# Altium PCB final.PcbDoc
Units mm, origin at the board's own origin, x right, y up, seen from the top; angles counter-clockwise.
Board outline 57 x 40.78 mm, 2 copper layers (Top Layer, Bottom Layer); 66 components, 53 nets, 287 pads, 60 vias.
Unrouted connection lines stored in the file: 75.
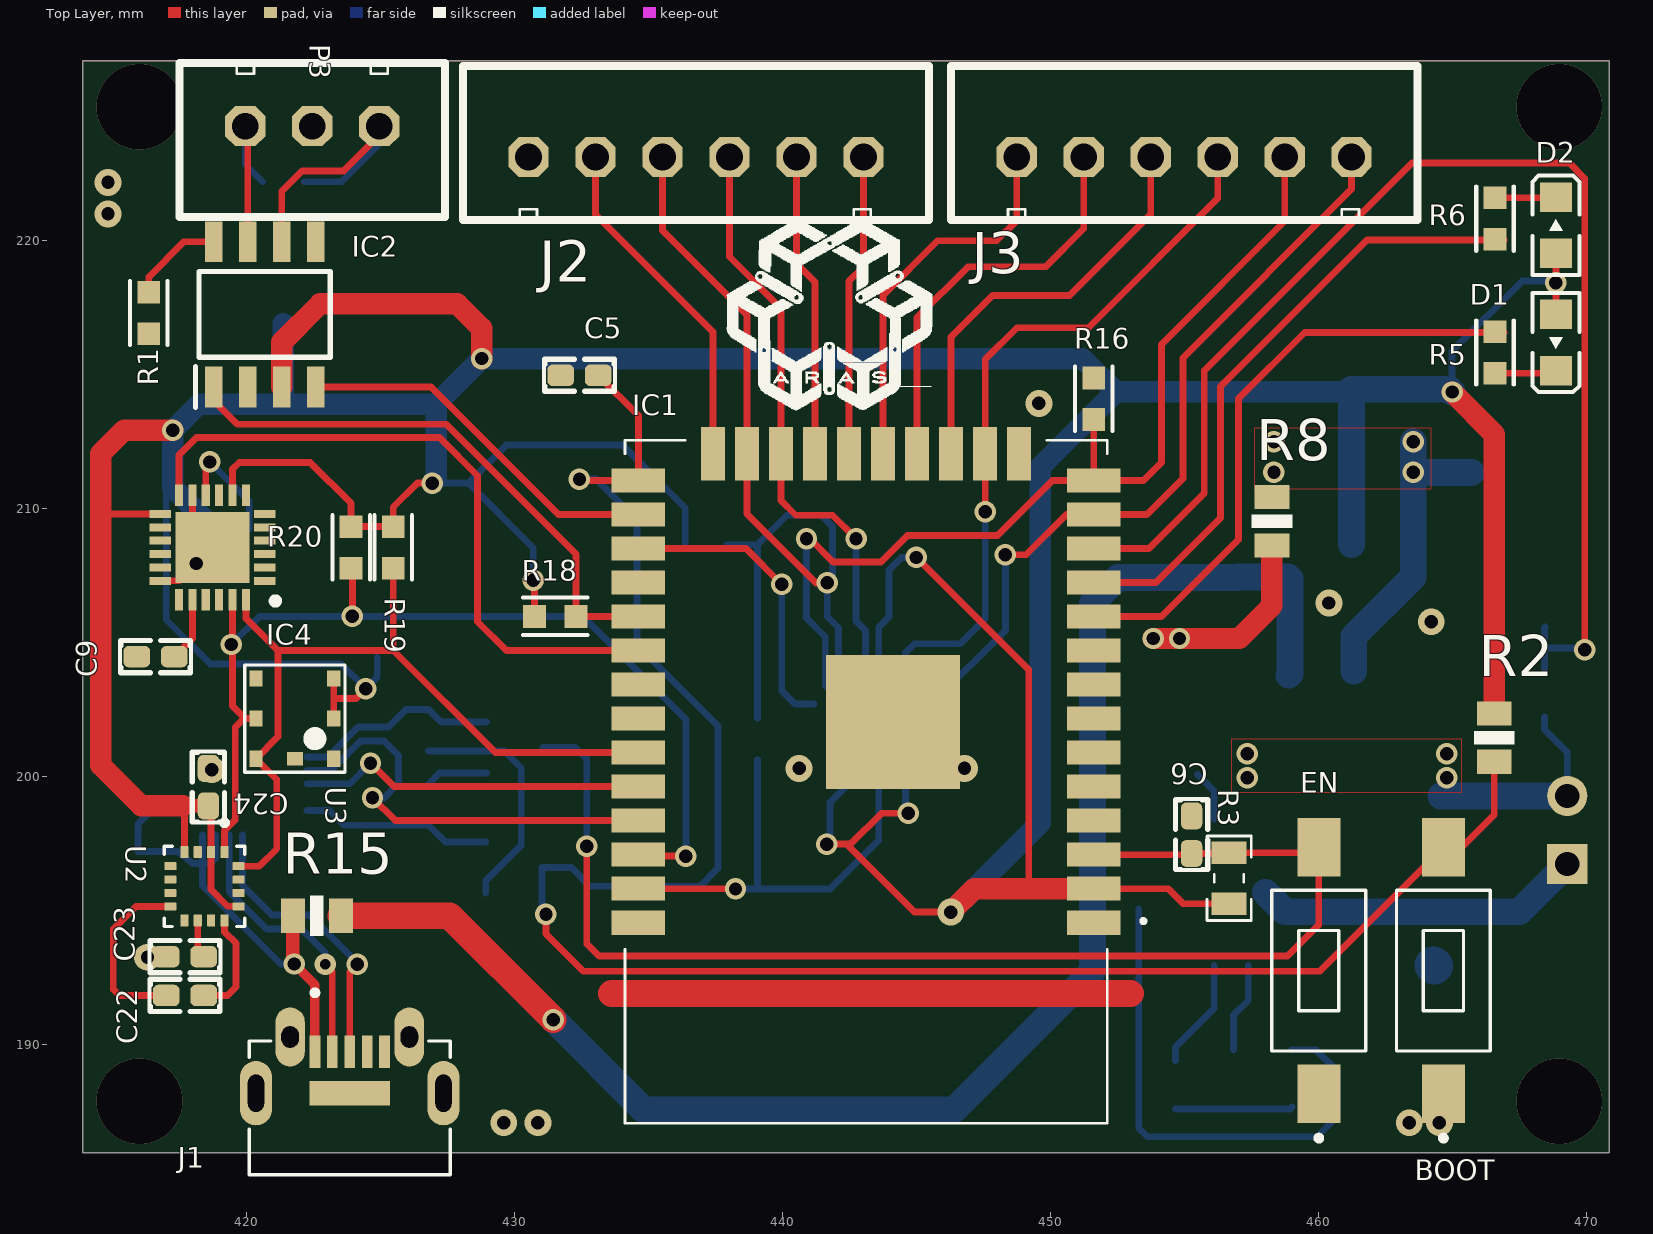
[diagram p0: Top Layer view]
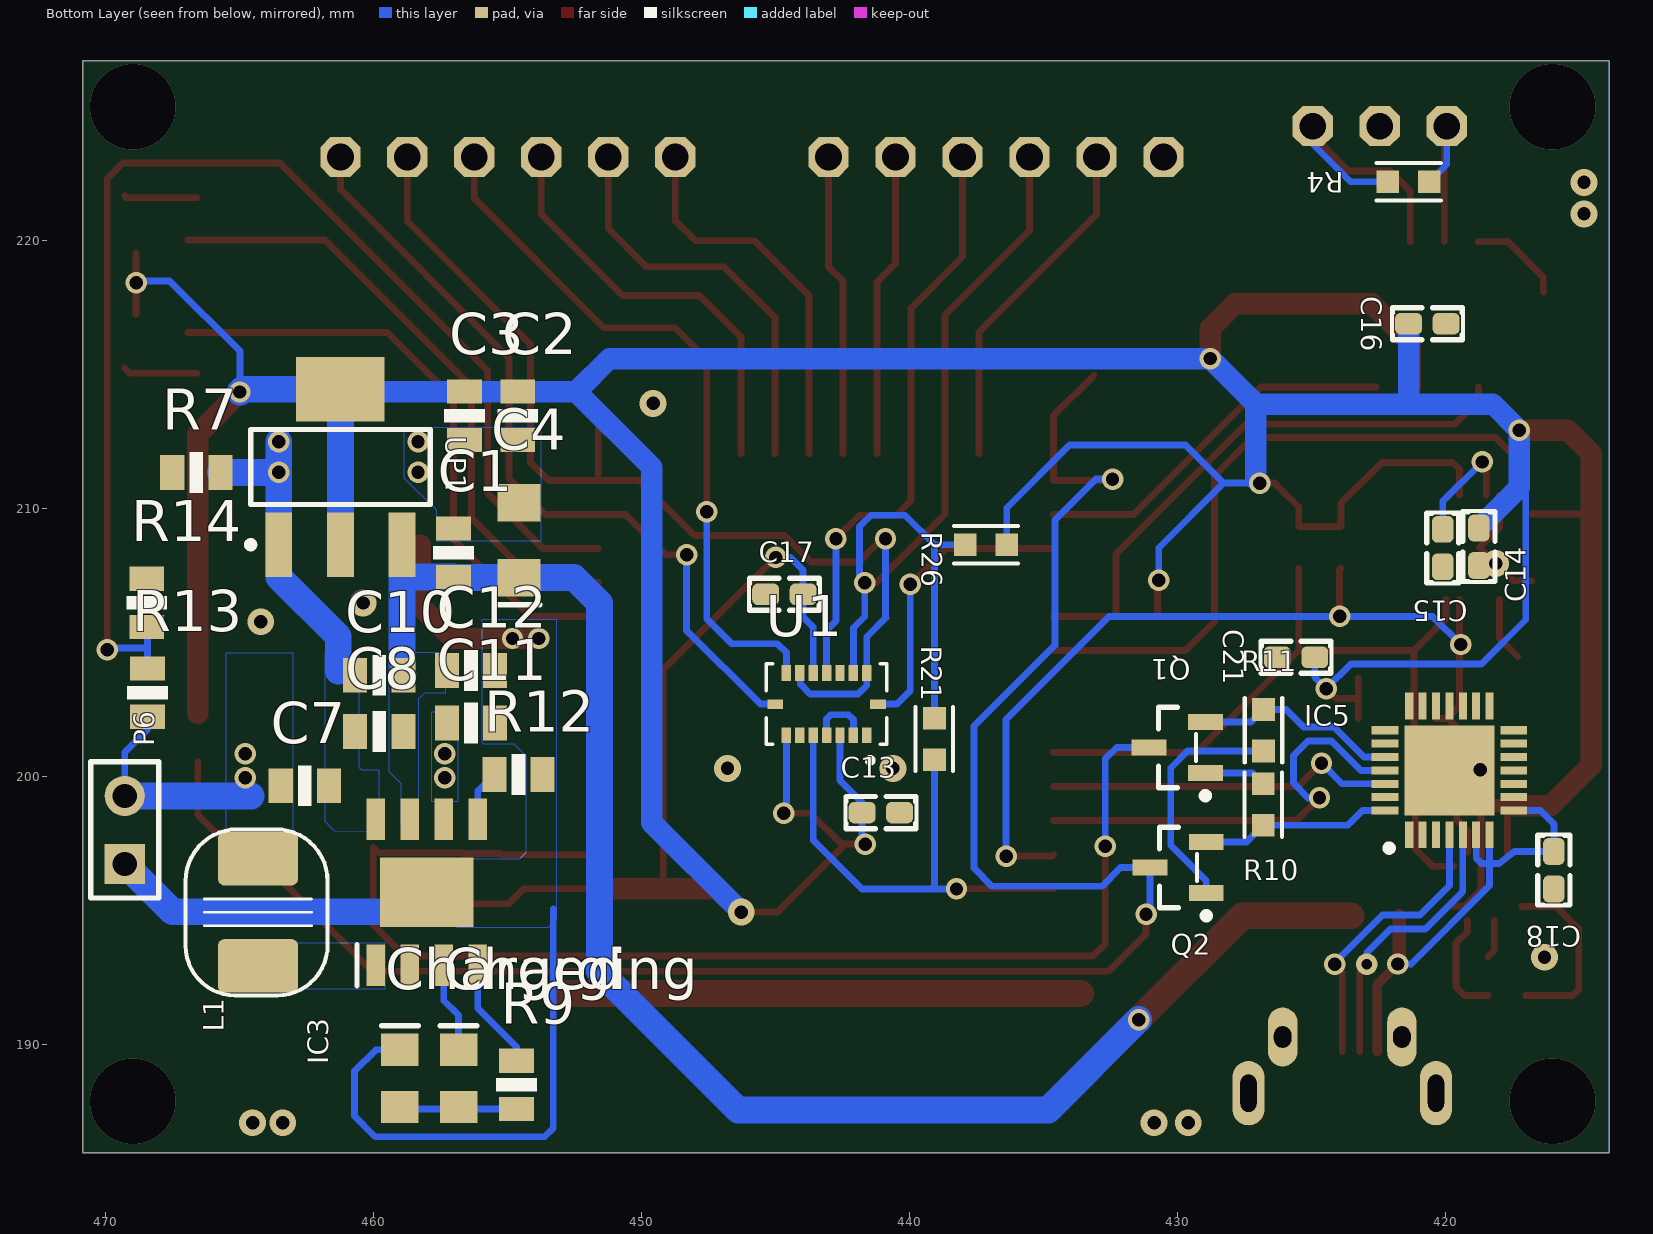
[diagram p1: Bottom Layer view, seen from below]
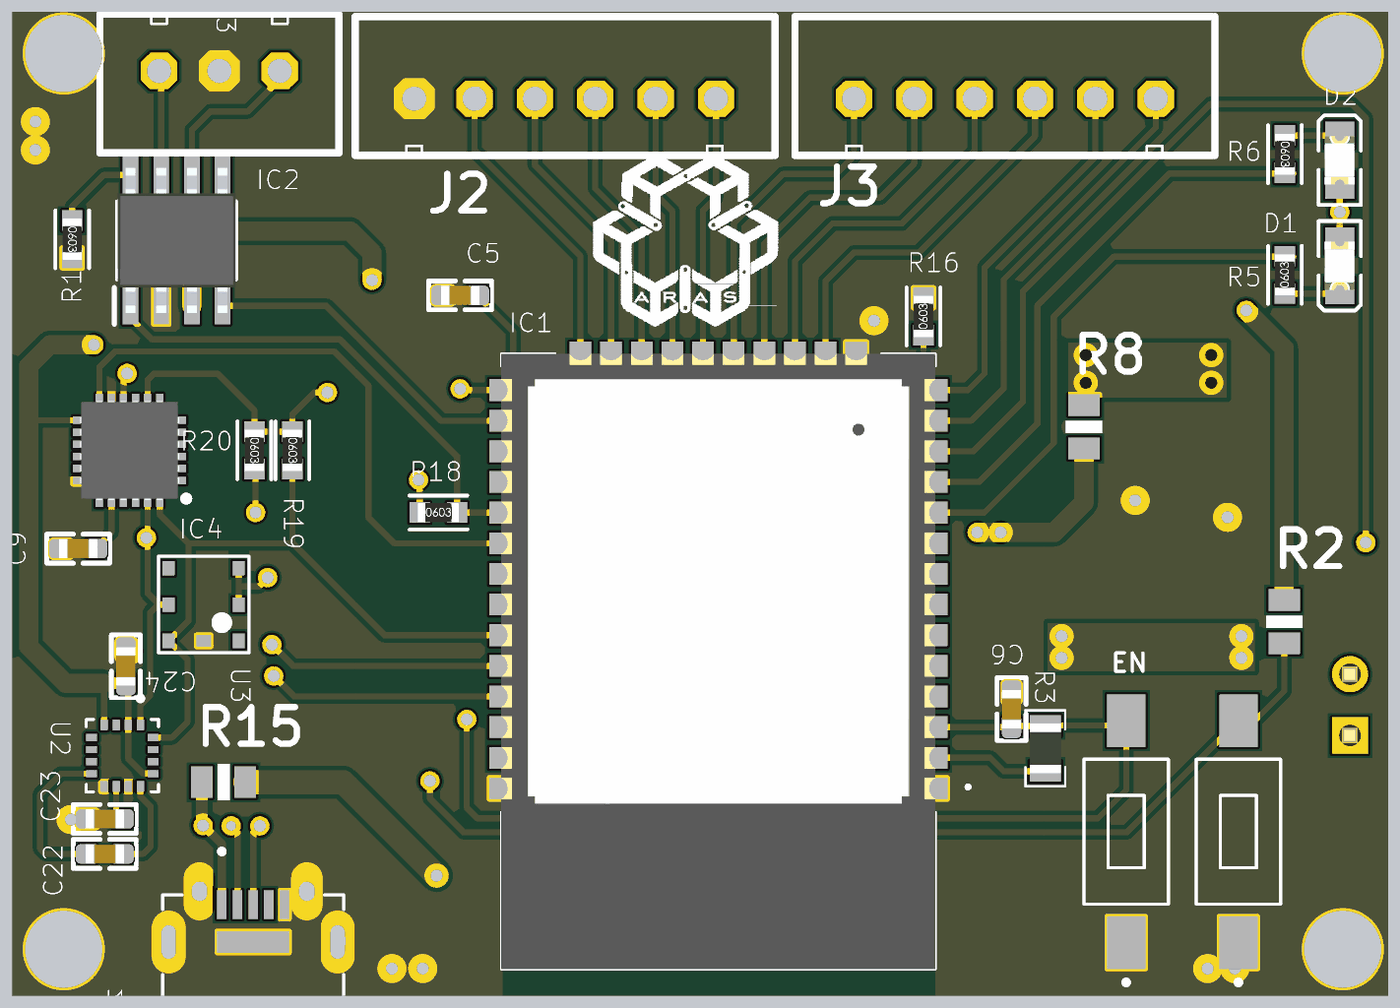
[diagram p2: 3D render of the assembled board from above, using the file's embedded part models]
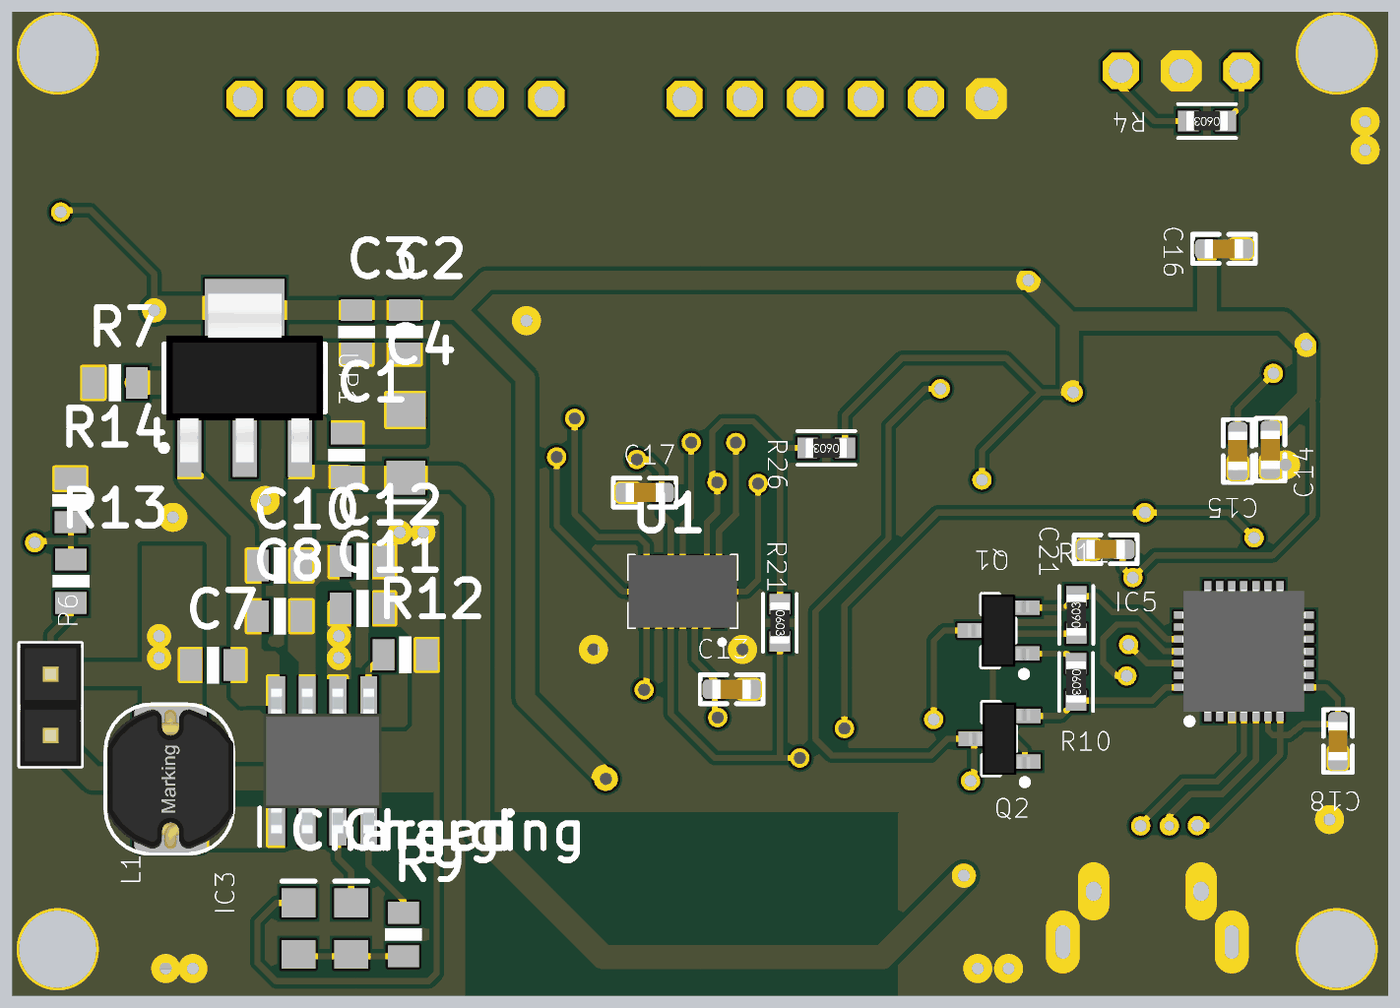
[diagram p3: 3D render of the assembled board from below, using the file's embedded part models]

## Layer stack, top to bottom
Top Solder: solder mask 0.0102, Solder Resist, Dk 3.5
Top Layer: signal copper 0.0356
Dielectric 1: dielectric 0.32, FR-4, Dk 4.8
Bottom Layer: signal copper 0.0356
Bottom Solder: solder mask 0.0102, Solder Resist, Dk 3.5

## Board outline
413.875,185.95 470.875,185.95 470.875,226.725 413.875,226.725

## Design rules (kind name [scope] priority, off if disabled: settings)
Clearance [All] p1: gap=0.178 ignorepadtopadclearanceinfootprint=TRUE except(0: Arc-Hole Track-Hole SMDPad-Hole THPad-Hole Via-Hole Fill-Hole Poly-Hole Region-Hole Text-Hole)
PolygonConnect [All] p1: connectstyle=Direct reliefconductorwidth=0.254 reliefentries=4 polygonreliefangle="90 Angle" airgapwidth=0.254
RoutingVias [All] p1: holewidth=0.711 width=1.27 viastyle="Through Hole" minholewidth=0.711 minwidth=1.27 maxholewidth=0.711 maxwidth=1.27
SolderMaskExpansion [All] p1: expansion=0.102
Width [All] p1: maxlimit=2 minlimit=0.254 preferedwidth=0.254
30 further rules are at their usual default settings.

## Components (designator, comment, footprint, x,y, rotation, side; value= is the part's Value field where it differs from the comment)
BOOT "1437566-4" SW_1437566-4 464.675,192.75 r90 top
C1 "Cap" _0805 457.025,208.35 r90 bottom value=100nf
C2 "Cap" _0805 454.625,213.464 r270 bottom value=22uf
C3 "Cap" _0805 456.616,213.464 r270 bottom value=100NF
C4 "Cap-Pol" _EIA3216 454.575,208.825 r270 bottom value=22uf
C5 "0.1uF" C0603 432.425,214.975 r0 top
C6 "1nf" C0603 455.275,197.825 r270 top
C7 "Cap" _0805 462.575,199.653 r180 bottom value=10uf
C8 "Cap" _0805 459.8,201.678 r0 bottom value=22uf
C9 "220pF" C0603 416.6,204.475 r0 top
C10 "Cap" _0805 459.8,203.778 r0 bottom value=22uf
C11 "Cap" _0805 456.375,202 r180 bottom value=1uf
C12 "Cap" _0805 456.375,203.95 r180 bottom value=1uf
C13 "0.1uF" C0603 441.075,198.65 r0 bottom
C14 "0.1uF" C0603 418.75,208.575 r270 bottom
C15 "0.1uF" C0603 420.1,208.525 r90 bottom
C16 "100nF" C0603 420.675,216.9 r0 bottom
C17 "100nF" C0603 444.675,206.8 r180 bottom
C18 "100nF" C0603 415.95,196.5 r270 bottom
C21 "100nF" C0603 425.575,204.45 r180 bottom
C22 "0.22uF" C0603 417.7,191.825 r180 top
C23 "4.7uF" C0603 417.7,193.275 r0 top
C24 "100nF" C0603 418.575,199.6 r90 top
Charged "LED" _LED-0805 459.025,188.678 r90 bottom
Charging "LED" _LED-0805 456.838,188.678 r90 bottom
D1 "LED SMD PACKAGE" LED_SMD_0805 468.875,216.2 r90 top
D2 "LED SMD PACKAGE" LED_SMD_0805 468.875,220.575 r270 top
EN "1437566-4" SW_1437566-4 460.025,192.75 r90 top
IC1 "ESP-WROOM-32D" ESPWROOM32D 443.125,199.8 r180 top
IC2 "SN65HVD230D" SOIC127P600X175-8N 420.675,217.25 r90 top
IC3 "ETA9742" SOIC127P600X175-9N 458.025,195.678 r90 bottom
IC4 "MPU-6050" QFN50P400X400X95-25N 418.725,208.55 r180 top
IC5 "CP2102_9" QFN50P500X500X105-29N-D 419.85,200.225 r90 bottom
J1 "UJ2-MIBH2-4-SMT-TR" CUI_UJ2-MIBH2-4-SMT-TR 423.85,187.625 r0 top
J2 "XH_6PIN" XH_6PIN 428.075,220.775 r0 top
J3 "XH_6PIN" XH_6PIN 446.3,220.775 r0 top
L1 "4µ7" "Inductor SMD 3x3.2mm" 464.325,194.928 r90 bottom
P3 "XH_3PIN" XH_3PIN 427.4,226.625 r180 top
P6 "Battery" HDR1X2 469.3,196.735 r90 bottom
Q1 "BC817" SOT23_N 430.011,201.081 r0 bottom
Q2 "BC817" SOT23_N 429.975,196.6 r0 bottom
R1 "Resistor SMD 0603" SMD-0603-RES 416.35,217.3 r180 top value=10K
R2 "Resistor" _0805 466.575,201.45 r270 top value=1K
R3 "10K" RES0805 456.675,196.2 r270 top
R4 "Resistor SMD 0603" SMD-0603-RES 421.375,222.2 r90 bottom value=120
R5 "Resistor SMD 0603" SMD-0603-RES 466.6,215.825 r0 top value=220
R6 "Resistor SMD 0603" SMD-0603-RES 466.6,220.825 r180 top value=220
R7 "Resistor" _0805 466.625,211.35 r0 bottom value=1K
R8 "Resistor" _0805 458.275,209.525 r90 top value=1K
R9 "Resistor" _0805 454.675,188.486 r90 bottom value=1K
R10 "Resistor SMD 0603" SMD-0603-RES 426.8,198.95 r0 bottom value=10K
R11 "Resistor SMD 0603" SMD-0603-RES 426.791,201.728 r180 bottom value=10K
R12 "Resistor" _0805 454.6,200.075 r0 bottom value=1K
R13 "Resistor" _0805 468.45,203.128 r270 bottom value=1K
R14 "Resistor" _0805 468.475,206.478 r270 bottom value=1K
R15 "Resistor" _0805 422.625,194.8 r0 top value=1K
R16 "Resistor SMD 0603" SMD-0603-RES 451.625,214.1 r0 top value=4.7k
R18 "Resistor SMD 0603" SMD-0603-RES 431.525,205.975 r270 top value=4.7k
R19 "Resistor SMD 0603" SMD-0603-RES 425.475,208.55 r180 top value=4.7k
R20 "Resistor SMD 0603" SMD-0603-RES 423.9,208.55 r180 top value=4.7k
R21 "Resistor SMD 0603" SMD-0603-RES 439.075,201.4 r0 bottom value=0
R26 "Resistor SMD 0603" SMD-0603-RES 437.15,208.65 r90 bottom value=4.7k
U1 "BMI088" PQFN50P450X300X100-16N 443.1,202.7 r0 bottom
U2 "HMC5883L-TR" XDCR_HMC5883L-TR 418.427,195.9 r270 top
U3 "BMP180" BMP180 421.8,202.16 r270 top
UP1 "3V3" SOT223_N 461.25,211.55 r90 bottom

## Footprints (in the part's own frame and the unit in brackets; to place one, negate y for a bottom-side part, rotate by r counter-clockwise, add the part's x,y. Pads: shape width x height; smd on the part's side, far side on the other; paste and mask are expansions set on the pad)
_0805 [mm]
  rect 0.9x1.3 smd: 1(-0.9,0) 2(0.9,0)
  silkscreen extent -0.25,-0.76 0.25,0.76
_EIA3216 [mm]
  rect 1.4x1.6 smd: +(1.4,0) -(-1.4,0)
  silkscreen extent 2.41,-0.76 2.41,0.76
_LED-0805 [mil]
  rect 47.24x55.12 smd: A(-40,0) K(44.06,0)
  silkscreen extent 79,-27 79,27
BMP180 [mm]
  rect 0.6x0.5 smd: 1(1.5,1.45) 2(0,1.45) 3(-1.5,1.45) 4(-1.5,-1.45) 5(0,-1.45) 6(1.5,-1.45)
  rect 0.5x0.6 smd: 7(1.5,0)
  silkscreen extent -2,-1.88 2,1.88
C0603 [mm] "CHIP Capacitor, 1.6X0.8mm, 0603 (Make www.tarahiboard.com)"
  rrect50% 1x0.8 smd mask+0.075: 1(-0.7,0) 2(0.7,0)
  silkscreen extent -1.33,-0.6 1.32,0.6, body extent -0.8,-0.4 0.8,0.4, height 0.9
CUI_UJ2-MIBH2-4-SMT-TR [mm]
  rect 0.4x1.2 smd: 1(-1.3,2.1) 2(-0.65,2.1) 3(0,2.1) 4(0.65,2.1) 5(1.3,2.1)
  oval 1.2x2.4 hole 0.6 slot 1.4 at 90 deg: SH1(-3.5,0.55) SH4(3.5,0.55)
  oval 1.1x2.2 hole 0.65 slot 0.8 at 90 deg: SH2(-2.225,2.65) SH3(2.225,2.65)
  rect 3x0.9 smd: SH5(0,0.55)
  silkscreen extent -3.75,-2.5 3.75,4.4
ESPWROOM32D [mm]
  rect 2x0.9 smd: 1(-8.5,5.26) 2(-8.5,3.99) 3(-8.5,2.72) 4(-8.5,1.45) 5(-8.5,0.18) 6(-8.5,-1.09) 7(-8.5,-2.36) 8(-8.5,-3.63) 9(-8.5,-4.9) 10(-8.5,-6.17) 11(-8.5,-7.44) 12(-8.5,-8.71) 13(-8.5,-9.98) 14(-8.5,-11.25) 25(8.5,-11.25) 26(8.5,-9.98) 27(8.5,-8.71) 28(8.5,-7.44) 29(8.5,-6.17) 30(8.5,-4.9) 31(8.5,-3.63) 32(8.5,-2.36) 33(8.5,-1.09) 34(8.5,0.18) 35(8.5,1.45) 36(8.5,2.72) 37(8.5,3.99) 38(8.5,5.26)
  rect 0.9x2 smd: 15(-5.715,-12.25) 16(-4.445,-12.25) 17(-3.175,-12.25) 18(-1.905,-12.25) 19(-0.635,-12.25) 20(0.635,-12.25) 21(1.905,-12.25) 22(3.175,-12.25) 23(4.445,-12.25) 24(5.715,-12.25)
  rect 5x5 smd: 39(-1,-2.24)
  silkscreen extent -10.4,-12.75 9,12.75, body extent -9,-12.75 9,12.75, height 3.1
HDR1X2 [mm] "Connector; Header; 2 Position"
  rect 1.5x1.5 hole 0.9: 1(0,0)
  round 1.5 hole 0.9: 2(2.54,0)
  silkscreen extent -1.27,-1.27 3.81,1.27, body extent -1.27,-1.28 3.81,1.26, height 8.79
"Inductor SMD 3x3.2mm" [mm] "Inductor 4.7µH SMD 3x3.2mm"
  round 0.508 on Mech15: 0(0,0)
  rrect25% 2x3 smd: 1(-2,0) 2(2,0)
  silkscreen extent -3.1,-2.6 3.1,2.7, body extent -2.9,-2.6 2.89,2.6, height 4.5
LED_SMD_0805 [mm] "SMD Mono-color Chip LED, body 2.0x1.25mm"
  rect 1.1x1.2 smd: 1(-1.05,0) 2(1.05,0)
  silkscreen extent -1.85,-0.88 1.85,0.88, body extent -1,-0.62 1,0.63, height 0.7
PQFN50P450X300X100-16N [mm]
  rect 0.35x0.59 smd: 1(-1.5,1.165) 2(-1,1.165) 3(-0.5,1.165) 4(0,1.165) 5(0.5,1.165) 6(1,1.165) 7(1.5,1.165) 9(1.5,-1.165) 10(1,-1.165) 11(0.5,-1.165) 12(0,-1.165) 13(-0.5,-1.165) 14(-1,-1.165) 15(-1.5,-1.165)
  rect 0.59x0.35 smd: 8(1.915,0) 16(-1.915,0)
  silkscreen extent -2.25,-1.5 2.25,2.2, body extent -2.25,-1.5 2.25,1.5, height 1
QFN50P400X400X95-25N [mm]
  rect 0.8x0.3 smd: 1(-1.95,1.25) 2(-1.95,0.75) 3(-1.95,0.25) 4(-1.95,-0.25) 5(-1.95,-0.75) 6(-1.95,-1.25) 13(1.95,-1.25) 14(1.95,-0.75) 15(1.95,-0.25) 16(1.95,0.25) 17(1.95,0.75) 18(1.95,1.25)
  rect 0.3x0.8 smd: 7(-1.25,-1.95) 8(-0.75,-1.95) 9(-0.25,-1.95) 10(0.25,-1.95) 11(0.75,-1.95) 12(1.25,-1.95) 19(1.25,1.95) 20(0.75,1.95) 21(0.25,1.95) 22(-0.25,1.95) 23(-0.75,1.95) 24(-1.25,1.95)
  rect 2.75x2.65 smd: 25(0,0)
  silkscreen extent -2.48,1.88 -2.23,2.12, body extent -2.05,-2.05 2.05,2.05, height 0.95
QFN50P500X500X105-29N-D [mm]
  rect 1x0.3 smd: 1(-2.4,1.5) 2(-2.4,1) 3(-2.4,0.5) 4(-2.4,0) 5(-2.4,-0.5) 6(-2.4,-1) 7(-2.4,-1.5) 15(2.4,-1.5) 16(2.4,-1) 17(2.4,-0.5) 18(2.4,0) 19(2.4,0.5) 20(2.4,1) 21(2.4,1.5)
  rect 0.3x1 smd: 8(-1.5,-2.4) 9(-1,-2.4) 10(-0.5,-2.4) 11(0,-2.4) 12(0.5,-2.4) 13(1,-2.4) 14(1.5,-2.4) 22(1.5,2.4) 23(1,2.4) 24(0.5,2.4) 25(0,2.4) 26(-0.5,2.4) 27(-1,2.4) 28(-1.5,2.4)
  rect 3.35x3.35 smd: 29(0,0)
  silkscreen extent -3.02,2.13 -2.78,2.38, body extent -2.55,-2.55 2.55,2.55, height 1.05
RES0805 [mm] "Chip Resistor, 2-Leads, Body 2/00x1/25mm, IPC Medium Density DESIGNER:ABBAS BASEREH"
  rect 0.85x1.3 smd: 1(-0.95,0) 2(0.95,0)
  silkscreen extent -1.57,-0.82 1.58,0.83, body extent -1.02,-0.65 1.02,0.65, height 0.5
SMD-0603-RES [mm] "(Make www.tarahiboard.com)"
  rect 0.85x0.85 smd: 1(0,0.775) 2(0,-0.775)
  silkscreen extent -0.7,-1.2 0.7,1.2, body extent -0.4,-0.85 0.4,0.85, height 0.56
SOIC127P600X175-8N [mm]
  rect 1.525x0.65 smd: 1(-2.712,1.905) 2(-2.712,0.635) 3(-2.712,-0.635) 4(-2.712,-1.905) 5(2.712,-1.905) 6(2.712,-0.635) 7(2.712,0.635) 8(2.712,1.905)
  silkscreen extent -3.48,-2.45 1.6,2.58, body extent -3,-2.45 3,2.45, height 1.75
SOIC127P600X175-9N [mm]
  rect 1.55x0.7 smd: 1(-2.725,1.905) 2(-2.725,0.635) 3(-2.725,-0.635) 4(-2.725,-1.905) 5(2.725,-1.905) 6(2.725,-0.635) 7(2.725,0.635) 8(2.725,1.905)
  rect 2.6x3.5 smd: 9(0,0)
  silkscreen extent -3.5,2.61 -1.95,2.61, body extent -3,-2.45 3,2.45, height 1.75
SOT23_N [mm] "SOT23, 3-Leads, Body 2.9x1.3mm, Pitch 0.95mm, Lead Span 2.3mm, IPC Medium Density"
  rect 1.3x0.6 smd: 1(-1.05,0.95) 2(-1.05,-0.95) 3(1.05,0)
  silkscreen extent -1.17,-1.5 0.7,1.92, body extent -1.27,-1.5 1.27,1.5, height 1.1
SOT223_N [mm] "SOT223, 4-Leads, Body 6.5x3.5mm, Pitch 2.3mm, Lead Span 7mm, IPC Medium Density"
  rect 2.4x1 smd: 1(-2.9,2.3) 2(-2.9,0) 3(-2.9,-2.3)
  rect 2.4x3.3 smd: 4(2.9,0)
  silkscreen extent -3.02,-3.35 1.4,3.48, body extent -3.49,-3.24 3.49,3.24, height 1.64
SW_1437566-4 [mm]
  rect 2.18x1.6 smd: 1(-4.6,0) 2(4.6,0)
  silkscreen extent -6.35,-1.75 3,1.75
XDCR_HMC5883L-TR [mm]
  rrect17% 0.45x0.3 smd: 1(-1.275,0.75) 2(-1.275,0.25) 3(-1.275,-0.25) 4(-1.275,-0.75) 9(1.275,-0.75) 10(1.275,-0.25) 11(1.275,0.25) 12(1.275,0.75)
  rrect17% 0.3x0.45 smd: 5(-0.75,-1.275) 6(-0.25,-1.275) 7(0.25,-1.275) 8(0.75,-1.275) 13(0.75,1.275) 14(0.25,1.275) 15(-0.25,1.275) 16(-0.75,1.275)
  silkscreen extent -2.47,-1.5 1.5,1.5
XH_3PIN [mm]
  oct 1.5x1.5 hole 1: 1(2.45,2.35) 2(4.95,2.35) 3(7.45,2.35)
  silkscreen extent 0,0 9.9,5.75
XH_6PIN [mm]
  oct 1.5x1.5 hole 1: 1(2.45,2.35) 2(4.95,2.35) 3(7.45,2.35) 4(9.95,2.35) 5(12.45,2.35) 6(14.95,2.35)
  silkscreen extent 0,0 17.4,5.75

## Part data
BOOT EN: "Switch Tactile OFF _ON_ SPST Rectangular Button Gull Wing 0.05A 12VDC 1.77N SMD T/R", Contact_Current_Rating="50 mA", Package=None, Configuration_Pole-Throw="Single Pole - Single Throw", Digi-Key_Part_Number=450-1758-1-ND, Digi-Key_Purchase_URL=https://www.digikey.com/product-detail/en/te-connectivity-alcoswitch-switches/FSMSMTR/450-1758-1-ND/2271637?utm_source=snapeda&utm_medium=aggregator&utm_campaign=symbol, MF="TE Connectivity", MP=FSMSMTR, SnapEDA_Link=https://www.snapeda.com/parts/FSMSMTR/TE%20Connectivity%20ALCOSWITCH%20Switches/view-part/2118497/?ref=snap, TE_purchase_URL=https://www.te.com/usa-en/product-1437566-4.html?te_bu=Cor&te_type=disp&te_campaign=seda_glo_cor-seda-global-disp-prtnr-fy19-seda-model-bom-cta_sma-317_1&elqCampaignId=32493
C1 C2 C3 C7 C8 C10 C11 C12: library part Cap_1
C5 C6 C9 C13 C14 C15 C16 C17 C18 C21 C22 C23 C24: library part "CAP SMD 0805", "CAP 0805", Data=16-12-2016, Desc.="CAP SMD 0805", Designer="Abbas Basereh"
D1 D2: "SMD Mono-color Chip LED Waterclear", Forward Voltage="3.2 V", Part Number=150080BS75000, Peak Wavelength="465 nm", Published Date="Jan 2017", Publisher="Ali Hafizi"
IC1: "Integrated Circuit", Manufacturer_Name="Espressif Systems", Mouser Part Number=356-ESP-WROOM-32D, Datasheet Link=https://componentsearchengine.com/Datasheets/1/ESP-WROOM-32D.pdf, Height=3.2mm, Manufacturer_Part_Number=ESP-WROOM-32D, Mouser Price/Stock=https://www.mouser.co.uk/ProductDetail/Espressif-Systems/ESP-WROOM-32D?qs=MLItCLRbWsyWVKgdQMcFuQ%3D%3D
IC2: "Integrated Circuit", Manufacturer_Name="Texas Instruments", Mouser Part Number=595-SN65HVD230D, Arrow Part Number=SN65HVD230D, Arrow Price/Stock=https://www.arrow.com/en/products/sn65hvd230d/texas-instruments?region=nac, Datasheet Link=http://www.ti.com/lit/ds/symlink/sn65hvd230.pdf, Height=1.75mm, Manufacturer_Part_Number=SN65HVD230D, Mouser Price/Stock=https://www.mouser.co.uk/ProductDetail/Texas-Instruments/SN65HVD230D?qs=QViXGNcIEAskSxPh50NSwA%3D%3D
IC3: "Integrated Circuit", Manufacturer_Name="ETA Solutions", Datasheet Link=https://cdn.datasheetspdf.com/pdf-down/E/T/A/ETA9742-ETA.pdf, Height=1.75mm, Manufacturer_Part_Number=ETA9742
IC4: "Integrated Circuit", Manufacturer_Name=TDK, Mouser Part Number=410-MPU-6050, Arrow Part Number=MPU-6050, Arrow Price/Stock=https://www.arrow.com/en/products/mpu-6050/invensense?region=nac, Datasheet Link=https://datasheet.lcsc.com/szlcsc/TDK-InvenSense-MPU-6050_C24112.pdf, Height=0.95mm, Manufacturer_Part_Number=MPU-6050, Mouser Price/Stock=https://www.mouser.co.uk/ProductDetail/TDK-InvenSense/MPU-6050?qs=u4fy%2FsgLU9O14B5JgyQFvg%3D%3D
IC5: "Integrated Circuit", Manufacturer_Name="Silicon Labs", Manufacturer_Part_Number=CP2102/9, Datasheet Link=https://www.silabs.com/documents/public/data-sheets/CP2102-9.pdf, Height=1.05mm
J1: "Micro B, USB 2.0, 1.8 A, Right Angle, Surface Mount _SMT_, USB Receptacle", Package=None, Availability=Unavailable, CUI_purchase_URL=https://www.cuidevices.com/product/interconnect/connectors/usb-connectors/uj2-mibh2-4-smt?utm_source=snapeda.com&utm_medium=referral&utm_campaign=snapedaBOM, MF="CUI Devices", MP=UJ2-MIBH2-4-SMT-TR, Price=None, SnapEDA_Link=https://www.snapeda.com/parts/UJ2-MIBH2-4-SMT-TR/CUI%20Devices/view-part/702231/?ref=snap
L1: library part "Inductor 4.7µH SMD 3x3.2mm", "Inductor 4.7µH SMD 3x3.2mm", Operating Temperature="-40°C ~ 125°C", Tolerance=±20%, Package / Case="Inductor 4.7µH SMD 3x3.2mm", SCDType=source, Supplier 1=Digi-Key, Type="Ferrite Core"
P6: library part "Header 2", "Header, 2-Pin", LatestRevisionDate=17-Jul-2002, LatestRevisionNote="Re-released for DXP Platform.", Publisher="Altium Limited"
Q1 Q2: "45 V, 500 mA NPN general-purpose transistors", ComponentLink1Description="Manufacturer Link", ComponentLink1URL=http://www.nxp.com/, ComponentLink2Description=Datasheet, ComponentLink2URL=http://www.nxp.com/, DatasheetVersion=2017, LatestRevisionDate=2017, LatestRevisionNote="IPC-7351 Footprint Added.", PackageDescription="3-Pin SOT-23 Package 0.95 mm Pitch, 2.3 mm Lead Span", PackageReference=SOT23, PackageVersion=2017-2-8, Published=2017-2-8, Publisher="Abbas Basereh"
R3: library part "RES SMD PACKAGE", "TOTAL SMD RESISTOR PACK", Data=2017-3-10, Desc.="RES SMD PAKAGES", Designer="Abbas Basereh"
U1: "Accelerometer, Gyroscope, 6 Axis Sensor I²C, SPI Output", Package="VFLGA-16 Bosch Sensortec", Availability="In Stock", Check_prices=https://www.snapeda.com/parts/BMI088/Bosch%20Sensortec/view-part/2774026/?ref=eda, MF="Bosch Sensortec", MP=BMI088, Price=None, Purchase-URL=https://pricing.snapeda.com/search/part/BMI088/?ref=eda, SnapEDA_Link=https://www.snapeda.com/parts/BMI088/Bosch%20Sensortec/view-part/2774026/?ref=snap
U2: "Magnetoresistive Sensor X, Y, Z Axis 16-LCC", Package="LCC-16 Honeywell", Availability=Unavailable, MF=Honeywell, MP=HMC5883LTR, Price=None, SnapEDA_Link=https://www.snapeda.com/parts/HMC5883LTR/Honeywell/view-part/1099769/?ref=snap
U3: "Pressure Sensor 4.35PSI ~ 15.95PSI _30kPa ~ 110kPa_ Absolute 16 ~ 19 b 7-VLGA", Package="VLGA-7 Bosch Sensortec", Digi-Key_Part_Number=828-1027-1-ND, Digi-Key_Purchase_URL=https://www.digikey.com/product-detail/en/bosch-sensortec/BMP180/828-1027-1-ND/2688260?utm_source=snapeda&utm_medium=aggregator&utm_campaign=symbol, MF="Bosch Sensortec", MP=BMP180, SnapEDA_Link=https://www.snapeda.com/parts/BMP180/Bosch%20Sensortec/view-part/587596/?ref=snap
UP1: library part AMS1117-x.x, "x.x Volt, 800mA Low-Dropout Linear Regulator, 4-pin SOT-223", Data=16-12-2016, Designer="Ali Hafizi"
Charged Charging: PROD_ID=DIO-09955
R1 R4 R5 R6 R10 R11 R16 R18 R19 R20 R21 R26: ComponentLink1Description="Website: Tarahiboard", ComponentLink1URL=https://www.tarahiboard.com/, ComponentLink2Description=Telegram, ComponentLink2URL=https://t.me/tarahiboard, ComponentLink3Description=Instagram, ComponentLink3URL=https://instagram.com/tarahiboard, DatasheetVersion=2021

## Via types
v1: diameter 0.8, hole 0.5, Top Layer to Bottom Layer, 40 vias
v2: diameter 1, hole 0.5, Top Layer to Bottom Layer, 15 vias
v3: diameter 3.2, hole 3.2, Top Layer to Bottom Layer, 4 vias
v4: diameter 0.8, hole 0.4, Top Layer to Bottom Layer, 1 vias

## Nets (pads, with @x,y where several pads share a name; then routed paths per layer and width w, separated by ;. In a path a pad name is that pad's centre, name@x,y a point inside that pad or via, vN(x,y) a via of type N, cw(c..) or ccw(c..) an arc to the next point about the centre after c; other vN are vias at no path point)
3v3: C2.1 C3.1 C13.2 C14.1 C16.2 C17.2 C21.2 C24.1 D1.2 D2.2 IC1.2 IC2.3 IC4.8 IC4.13 R2.1 R3.2 R18.2 R19.2 R20.2 R26.2 U1.3 U1.7 U1.11 U2.2 U2.4 U2.13 U3.2 U3.3 UP1.2 UP1.4 | length 241.6
  Top Layer w0.254: 414.55,209.75 414.6,209.8 IC4.13 ; 417.625,198.9 417.677,198.848 U2.4 ; C24.1 418.677,198.798 U2.2 418.677,195.773 419.295,195.155 419.702,195.155 U2.13 ; IC4.8 419.475,211.475 419.725,211.725 422.375,211.725 423.9,210.2 R20.2 R19.2 425.475,210.05 426.375,210.95 v1(426.925,210.95) ; U3.2 423.25,202.91 ; U3.3 423.25,202.91 ; v1(424.45,203.275) 424.085,202.91 423.25,202.91 ; v1(430.7,207.325) 430.75,207.275 R18.2 ; v1(441.65,197.475) 442.4,197.475 ; v1(444.7,198.625) 443.7,198.625 442.55,197.475 442.4,197.475 ; v1(445,208.175) 449.2,203.975 449.2,195.86 449.25,195.81 ; v2(446.287,194.937) 444.938,194.937 442.4,197.475 ; IC1.2 454.39,195.81 454.95,195.25 R3.2 ; D1.2 v1(468.875,218.425) D2.2
  Top Layer w0.5: 417.625,198.9 C24.1
  Top Layer w0.8: v1(417.25,212.925) 415.425,212.925 414.55,212.05 414.55,209.75 414.55,200.425 416.075,198.9 417.625,198.9 ; IC2.3 421.31,216.21 422.739,217.639 427.861,217.639 428.775,216.725 v1(428.775,215.6) ; v2(446.287,194.937) 447.16,195.81 449.25,195.81 IC1.2 ; v1(465,214.35) 466.575,212.775 R2.1
  Bottom Layer w0.254: 417.25,210.775 417,210.525 417,205.85 418.65,204.2 423.525,204.2 v1(424.45,203.275) 424.875,203.7 C21.2 ; v1(426.925,210.95) 428.275,210.95 ; v1(430.7,207.325) 430.7,208.525 428.275,210.95 ; R26.2 436.375,210.025 434.025,212.375 429.7,212.375 428.275,210.95 ; v1(441.65,197.475) 441.775,197.6 C13.2 441.775,199.025 442.6,199.85 U1.3 ; U1.11 443.6,205.575 443.975,205.95 C17.2 443.975,207.7 444.45,208.175 v1(445,208.175) ; U1.7 444.6,198.725 v1(444.7,198.625) ; v1(465,214.35) 465,215.875 467.625,218.5 v1@469.1,218.5
  Bottom Layer w0.4: C14.1@418.65,209.175 C14.1
  Bottom Layer w0.8: C14.1 417.25,210.775 v1(417.25,212.925) 418.225,213.9 421.325,213.9 ; C16.2 421.375,213.95 421.325,213.9 ; v1(426.925,210.95) 427.075,211.1 427.075,213.9 ; v2(446.287,194.937) 449.625,198.275 449.625,211.55 452.439,214.364 ; UP1.4@461.164,214.364 C3.1 C2.1 452.439,214.364 ; 421.325,213.9 427.075,213.9 ; 427.075,213.9 v1(428.775,215.6) 451.203,215.6 452.439,214.364
  Bottom Layer w1: UP1.4@461.164,214.364 461.25,214.278 UP1.2 ; UP1.4 464.9,214.45 v1(465,214.35)
5V: C1.1 C4.+ C8.1 C10.1 C12.1 IC3.7 R15.2 UP1.3 | length 58.4
  Top Layer w1: R15.2 427.575,194.8 v1(431.45,190.925)
  Bottom Layer w1: v1(431.45,190.925) 434.825,187.55 446.4,187.55 451.575,192.725 451.575,206.475 452.525,207.425 C4.+ 457,207.425 C1.1 458.875,207.45 458.95,207.375 458.95,203.828 C10.1
21: IC1.21 J2.5 | length 11.4
  Top Layer w0.254: J2.5 440.525,219.15 441.22,218.455 IC1.21
AGND: C11.2 C12.2 Charged.K IC3.9 P6.1 R8.1 R12.1 | length 39.3
  Top Layer w0.8: v1(453.85,205.15) v1(454.825,205.15) 457.05,205.15 458.275,206.375 R8.1
  Bottom Layer w0.254: 453.3,195.05 453.3,186.875 453.625,186.55 459.95,186.55 460.725,187.325 460.725,189 459.928,189.797 Charged.K
  Bottom Layer w1: IC3.9 458.753,194.95 467.515,194.95 P6.1
Bat: C7.1 C11.1 IC3.6 L1.2 P6.2 R13.2 | length 8
  Bottom Layer w0.254: R13.2 468.45,201.75 469.3,200.9 P6.2
  Bottom Layer w1: 464.575,199.275 P6.2
  other v1: 457.35,199.95 464.8,199.95 457.35,200.85 464.8,200.85
Bat_Sense: IC1.12 R13.1 R14.2 | length 47.9
  Top Layer w0.254: IC1.12 453.685,208.51 455.75,210.575 455.75,215.15 463.5,222.9 469.375,222.9 469.95,222.325 v1(469.95,204.725)
  Bottom Layer w0.254: R13.1 468.45,204.791 ; R14.2 468.45,205.553 468.45,204.791 ; v1(469.95,204.725) 469.884,204.791 468.45,204.791
"CAN RX": IC1.26 IC2.4 | length 14
  Top Layer w0.254: IC2.4 426.887,214.538 431.645,209.78 IC1.26
"CAN TX": IC1.29 IC2.1 R18.1 | length 21.1
  Top Layer w0.254: IC2.1 418.77,214.03 419.65,213.15 427.45,213.15 432.3,208.3 R18.1 432.305,205.97 IC1.29
CS_ACC: IC1.23 J2.3 R21.2 R26.1 U1.14 | length 35.5
  Top Layer w0.254: J2.3 435.525,220.375 438.68,217.22 IC1.23 438.68,209.795 441.25,207.225 v1(441.675,207.225)
  Bottom Layer w0.254: R26.1 439.075,208.65 ; R21.2 439.075,208.65 ; U1.14 442.1,205.55 441.675,205.975 v1(441.675,207.225) 441.875,207.425 441.875,209.325 441.45,209.75 440.175,209.75 439.075,208.65
CS_GYR: IC1.37 R21.1 U1.5 | length 18.5
  Top Layer w0.254: IC1.37 438.24,195.81 v1(438.25,195.8)
  Bottom Layer w0.254: v1(438.25,195.8) 439.075,195.8 ; R21.1 439.075,195.8 ; U1.5 443.6,197.625 441.775,195.8 439.075,195.8
EN: C6.2 EN.2 IC1.3 Q1.3 R3.1 | length 48.1
  Top Layer w0.254: v1(432.7,197.4) 432.7,193.75 433.15,193.3 458.85,193.3 460.025,194.475 EN.2 459.825,197.15 R3.1 456.65,197.125 C6.2 455.23,197.08 IC1.3
  Bottom Layer w0.254: Q1.3 432.269,201.081 432.7,200.65 v1(432.7,197.4)
GND: BOOT.1 C5.1 C6.1 C9.1 C13.1 C14.2 C15.1 C16.1 C17.1 C18.2 C21.1 C23.1 C24.2 EN.1 IC1.1 IC1.15 IC1.38 IC1.39 IC2.2 IC4.11 IC4.18 IC4.25 IC5.3 IC5.29 J1.5 J1.SH1 J1.SH2 J1.SH3 J1.SH4 J1.SH5 J2.1 P3.2 R1.1 R7.2 R14.1 R16.1 U1.2 U1.4 U1.6 U2.9 U2.11 U3.7 | length 26.4
  Top Layer w0.254: IC4.18 416.775,207.305 417.48,207.305 IC4.25 417.975,209.3 IC4.11
  Top Layer w1: 433.625,191.9 453,191.9
  Bottom Layer w0.254: U1.2 442.1,202.125 442.275,202.3 442.95,202.3 443.1,202.15 U1.4
  other v2: 429.6,187.075 430.875,187.075 463.4,187.075 464.525,187.075 416.3,193.25 418.7,200.25 440.625,200.3 446.8,200.3 464.225,205.775 460.4,206.475 418.125,207.95 449.575,213.925 414.825,221 414.825,222.175
  other v3: 416,187.875 469,187.875 416,225 469,225
INT1: IC1.27 U1.16 | length 11.3
  Top Layer w0.254: IC1.27 438.64,208.51 v1(439.975,207.175)
  Bottom Layer w0.254: v1(439.975,207.175) 439.975,203.2 440.475,202.7 U1.16
INT2: IC1.22 J2.4 U1.12 | length 22.2
  Top Layer w0.254: J2.4 438.025,219.4 439.95,217.475 IC1.22 439.95,210.3 440.5,209.75 441.875,209.75 v1(442.75,208.875)
  Bottom Layer w0.254: v1(442.75,208.875) 442.75,205.8 443.1,205.45 U1.12
INT_MPU: IC1.30 IC4.12 | length 25.4
  Top Layer w0.254: IC4.12 417.475,212 418.125,212.65 427.2,212.65 428.625,211.225 428.625,205.775 429.7,204.7 IC1.30
IO0: BOOT.2 C5.2 IC1.25 Q2.3 R2.2 | length 73.9
  Top Layer w0.254: v1(431.175,194.85) 431.175,194.125 432.575,192.725 460.05,192.725 BOOT.2 465.35,197.35 466.575,198.575 R2.2 ; v1(432.425,211.1) 432.475,211.05 IC1.25 434.625,213.475 C5.2
  Bottom Layer w0.254: v1(431.175,194.85) 431.025,195 Q2.3 432.125,196.6 432.825,195.9 436.925,195.9 437.6,196.575 437.6,201.875 434.575,204.9 434.575,209.575 433.05,211.1 v1(432.425,211.1)
IO1: IC1.24 J2.2 | length 12.9
  Top Layer w0.254: J2.2 433.025,220.975 437.41,216.59 IC1.24
IO5: IC1.20 J2.6 | length 11.3
  Top Layer w0.254: IC1.20 442.49,218.49 443.025,219.025 J2.6
IO6: IC1.19 J3.1 | length 14.4
  Top Layer w0.254: IC1.19 443.76,217.96 445.8,220 448,220 448.75,220.75 J3.1
IO7: IC1.18 J3.2 | length 15.4
  Top Layer w0.254: IC1.18 445.03,217.13 446.925,219.025 449.825,219.025 451.25,220.45 J3.2
IO8: IC1.17 J3.3 | length 15.8
  Top Layer w0.254: IC1.17 446.3,216.4 447.85,217.95 450.725,217.95 453.75,220.975 J3.3
IO9: IC1.16 J3.4 U1.9 | length 26.7
  Top Layer w0.254: v1(447.575,209.875) 447.57,209.88 IC1.16 447.57,215.57 448.75,216.75 451.425,216.75 456.25,221.575 J3.4
  Bottom Layer w0.254: U1.9 444.6,204.625 444.925,204.95 446.625,204.95 447.575,205.9 v1(447.575,209.875)
IO10: IC1.14 J3.5 R16.2 U1.10 U1.15 | length 39.7
  Top Layer w0.254: v1(440.9,208.875) 441.022,208.875 441.897,208 443.675,208 444.675,209 448.025,209 450.075,211.05 IC1.14 ; R16.2 IC1.14 ; J3.5 458.75,220.725 454.15,216.125 454.15,211.725 453.475,211.05 IC1.14
  Bottom Layer w0.254: v1(440.9,208.875) 440.9,205.95 440.875,205.925 441.6,205.2 U1.15 441.6,203.4 441.925,203.075 443.711,203.075 444.08,203.444 444.08,203.845 U1.10
IO11: IC1.13 J3.6 U1.8 | length 29.7
  Top Layer w0.254: v1(448.325,208.275) 449.1,208.275 450.605,209.78 IC1.13 453.605,209.78 454.95,211.125 454.95,215.625 461.25,221.925 J3.6
  Bottom Layer w0.254: U1.8 445.575,202.7 448.325,205.45 v1(448.325,208.275)
NetC9_2: C9.2 IC4.20 | length 2.4
  Top Layer w0.254: C9.2 417.975,205.15 IC4.20
NetC15_2: C15.2 IC4.10 | length 4.4
  Top Layer w0.254: IC4.10 418.475,211.59 v1(418.625,211.74)
  Bottom Layer w0.254: v1(418.625,211.74) 420.1,210.265 C15.2
NetC18_1: C18.1 IC5.6 IC5.7 IC5.8 J1.1 R15.1 | length 18.7
  Top Layer w0.35: v1@421.725,193.05 v1(421.775,193) 422.55,192.225 J1.1
  Top Layer w0.5: v1@421.725,193.05 R15.1
  Bottom Layer w0.254: IC5.8 416.45,198.725 415.95,198.225 C18.1 417.417,197.2 417.992,196.75 418.35,196.75 ; IC5.7 418.35,196.75 ; IC5.6 418.85,196.95 418.65,196.75 418.35,196.75 ; v1(421.775,193) 421.275,193 418.35,195.925 418.35,196.75
NetC22_1: C22.1 U2.12 | length 4
  Top Layer w0.254: C22.1 419.285,191.825 419.6,192.14 419.6,193.775 419.177,194.198 U2.12
NetC22_2: C22.2 U2.8 | length 6.8
  Top Layer w0.254: C22.2 415.25,191.825 415.025,192.05 415.025,194.3 415.875,195.15 U2.8
NetC23_2: C23.2 U2.10 | length 1.4
  Top Layer w0.254: U2.10 418.177,193.498 C23.2
NetCharged_A: Charged.A Charging.A R9.1 | length 4.4
  Bottom Layer w0.254: R9.1 458.949,187.586 Charged.A
NetCharging_K: Charging.K IC3.3 | length 3.4
  Bottom Layer w0.254: Charging.K 456.838,191.088 457.39,191.64 IC3.3
NetD1_1: D1.1 R5.2 | length 2.8
  Top Layer w0.254: R5.2 469.1,215.05 D1.1@469.3,215.25
NetD2_1: D2.1 R6.2 | length 2.7
  Top Layer w0.254: R6.2 469.225,221.6 D2.1@469.3,221.675
NetIC1_10: IC1.10 R5.1 | length 22.8
  Top Layer w0.254: IC1.10 454.145,205.97 457.025,208.85 457.025,214.1 459.5,216.575 R5.1@466.95,216.575
NetIC1_11: IC1.11 R6.1 | length 23.5
  Top Layer w0.254: IC1.11 453.94,207.24 456.35,209.65 456.35,214.55 461.825,220.025 R6.1@466.95,220.025
NetIC2_6: IC2.6 P3.1 R4.1 | length 10.8
  Top Layer w0.254: IC2.6 421.31,221.835 422.074,222.599 423.624,222.599 424.95,223.925 P3.1
  Bottom Layer w0.254: R4.1 423.55,222.2 424.95,223.6 P3.1
NetIC2_7: IC2.7 P3.3 R4.2 | length 6.7
  Top Layer w0.254: P3.3 420.04,224.185 IC2.7
  Bottom Layer w0.254: P3.3 419.95,222.85 R4.2
NetIC2_8: IC2.8 R1.2 | length 3.5
  Top Layer w0.254: R1.2 416.35,218.65 417.662,219.962 IC2.8
NetIC3_1: IC3.1 L1.1 | length 0
  Bottom Layer w1.4: L1.1@464.3,192.953 L1.1
NetIC3_4: IC3.4 R9.2 | length 4.2
  Bottom Layer w0.254: R9.2 454.675,189.9 456.12,191.345 IC3.4
NetIC3_5: IC3.5 R12.2 | length 1.9
  Bottom Layer w0.254: R12.2 456.12,199.455 IC3.5
NetIC5_4: IC5.4 J1.3 | length 10.7
  Top Layer w0.254: J1.3 423.85,192.713 v1(424.125,192.988)
  Bottom Layer w0.254: IC5.4 419.85,195.925 420.95,194.825 422.35,194.825 v1@424.125,193.05
NetIC5_5: IC5.5 J1.2 | length 10.5
  Top Layer w0.254: v4(422.938,192.988) 423.2,192.725 J1.2
  Bottom Layer w0.254: IC5.5 419.35,195.7 420.75,194.3 422.05,194.3 422.938,193.412 v4(422.938,192.988)
NetIC5_24: IC5.24 Q1.2 R11.1 | length 7.6
  Bottom Layer w0.254: IC5.24 423.039,200.725 424.164,201.85 425.3,201.85 425.953,202.503 R11.1 427.262,202.031 Q1.2
NetIC5_28: IC5.28 Q2.2 R10.1 | length 7.2
  Bottom Layer w0.254: IC5.28 423.1,198.725 423.65,198.175 R10.1 427.425,197.55 Q2.2
NetQ1_1: Q1.1 R10.2 | length 2.3
  Bottom Layer w0.254: R10.2 427.206,200.131 Q1.1
NetQ2_1: Q2.1 R11.2 | length 8.9
  Bottom Layer w0.254: R11.2 429.622,200.953 430.25,200.325 430.25,197.425 428.925,196.1 Q2.1
PGND: C1.2 C2.2 C3.2 C4.- C7.2 C8.2 C10.2 IC3.8 R7.1 R8.2 UP1.1 | length 11.7
  Bottom Layer w1: 461.325,203.925 461.325,205.225 463.55,207.45 UP1.1 v1(463.55,211.35) ; v1(463.55,212.5) v1(463.55,211.35) ; R7.1 v1(463.55,211.35)
  other v1: 458.35,211.35 458.35,212.5
RXD0: IC1.35 IC5.25 | length 16.6
  Top Layer w0.254: v1(424.7,199.2) 425.55,198.35 IC1.35
  Bottom Layer w0.254: IC5.25 423.15,200.225 424.25,201.325 425.125,201.325 425.675,200.775 425.675,199.75 425.125,199.2 v1(424.7,199.2)
SCL: IC1.36 IC4.23 R20.1 U2.1 U3.5 | length 38.1
  Top Layer w0.254: U2.1 419.177,197.977 419.575,198.375 419.575,201.825 419.91,202.16 419.94,202.16 ; IC4.23 419.475,202.625 419.94,202.16 ; U3.5 419.94,202.16 ; R20.1 423.95,207.725 v1(423.95,205.975) ; IC1.36 434.68,197.025 v1(436.4,197.025)
  Bottom Layer w0.254: v1(419.425,204.925) 420.475,205.975 v1(423.95,205.975) 432.55,205.975 436.4,202.125 v1(436.4,197.025)
SDA: IC1.33 IC4.24 R19.1 U2.16 U3.6 | length 30.3
  Top Layer w0.254: U2.16 420.475,196.65 421.125,197.3 421.125,199.885 U3.6 421.175,201.485 421.175,204.7 ; IC4.24 419.975,205.9 421.175,204.7 ; R19.1 425.475,204.7 ; IC1.33 429.285,200.89 425.475,204.7 ; 421.175,204.7 425.475,204.7
TXD0: IC1.34 IC5.26 | length 13.1
  Top Layer w0.254: v1(424.625,200.5) 425.505,199.62 IC1.34
  Bottom Layer w0.254: IC5.26 423.85,199.725 v1(424.625,200.5)
pads on no net: IC1.4 IC1.5 IC1.6 IC1.7 IC1.8 IC1.9 IC1.28 IC1.31 IC1.32 IC2.5 IC3.2 IC4.1 IC4.2 IC4.3 IC4.4 IC4.5 IC4.6 IC4.7 IC4.9 IC4.14 IC4.15 IC4.16 IC4.17 IC4.19 IC4.21 IC4.22 IC5.1 IC5.2 IC5.9 IC5.10 IC5.11 IC5.12 IC5.13 IC5.14 IC5.15 IC5.16 IC5.17 IC5.18 IC5.19 IC5.20 IC5.21 IC5.22 IC5.23 IC5.27 J1.4 L1.0 U1.1 U1.13 U2.3 U2.5 U2.6 U2.7 U2.14 U2.15 U3.1 U3.4

## Polygon pours and split planes (outlines as drawn)
GND on Top Layer "Bottom Layer-No Net" (solid, remove dead copper, shelved, pour order 22): 413.875,185.95 413.875,226.725 470.875,226.725 470.875,185.95
PGND on Top Layer "Bottom Layer-No Net" (solid, remove dead copper, shelved, pour order 18): 457.625,213.025 464.2,213.025 464.2,210.725 457.625,210.725
Bat on Top Layer "Bottom Layer-No Net" (solid, remove dead copper, shelved, pour order 12): 456.775,201.4 465.35,201.4 465.35,199.4 456.775,199.4
GND on Bottom Layer "Bottom Layer-No Net" (solid, remove dead copper, shelved, pour order 20): 413.875,226.725 470.875,226.725 470.875,185.95 413.875,185.95
AGND on Bottom Layer "Bottom Layer-No Net" (solid, remove dead copper, shelved, pour order 14): 456.9,194.375 453.475,194.375 453.175,194.675 453.175,205.85 455.975,205.85 455.975,201.275 455.925,201.225 454.775,201.225 454.325,200.775 454.325,197.15 454.575,196.9 456.9,196.9
PGND on Bottom Layer "Bottom Layer-No Net" (solid, remove dead copper, shelved, pour order 16): 457.675,208.8 453.75,208.8 453.75,213 453.725,213.025 458.875,213.025 458.875,211.15 457.675,209.95
Bat on Bottom Layer "Bottom Layer-No Net" (solid, remove dead copper, shelved, pour order 10): 456.85,199.075 456.85,202.4 457.85,202.4 457.85,199.075
5V on Bottom Layer "Bottom Layer-No Net" (solid, remove dead copper, shelved, pour order 8): 458.325,198.25 458.325,202.9 458.1,203.125 457.325,203.125 457.325,204.475 457.475,204.625 459.45,204.625 459.45,200.2 459,199.75 459,198.25
PGND on Bottom Layer "Bottom Layer-No Net" (solid, remove dead copper, shelved, pour order 6): 459.8,197.975 459.8,200.225 460.45,200.225 460.55,200.325 460.55,204.6 461.825,204.6 461.825,198.325 461.45,197.95
Bat on Bottom Layer "Bottom Layer-No Net" (solid, remove dead copper, shelved, pour order 2): 465.525,196.25 463.05,196.25 463,196.3 463,204.6 465.525,204.6
NetIC3_1 on Bottom Layer "Bottom Layer-No Net" (solid, remove dead copper, shelved, pour order 0): 459.575,193.775 463.5,193.775 463.5,191.85 463.475,191.825 463.225,192.075 459.575,192.075

## Other copper
Top Layer:
  pour cut-out: 434.125,193.55 434.175,193.5 434.175,185.9 434.225,185.95 452.15,185.95 452.125,185.975 452.125,193.55
Bottom Layer:
  pour cut-out: 448.4,226.725 470.875,226.725
  pour cut-out: 443.95,193.175 444,193.125 444,185.525 444.05,185.575 461.975,185.575 461.95,185.6 461.95,193.175

## Silkscreen, mask and mechanical layers (free items; w line width, h text height)
Top Overlay:
  drawing of 1429 lines, arcs and shapes, not listed
Mechanical 15:
  lines w0.05: 442.499,188.55 442.499,193.75